# Altium PCB IMX6WBED.PcbDoc (part 5 of 10)
Units mil, origin at the board's own origin, x right, y up, seen from the top; angles counter-clockwise.
Board outline 3318.23 x 4815.16 mil, 6 copper layers (Top Layer, L2_GND_1, L3_INT_1, L6_INT_2, L7_PWR_2, Bottom Layer), stack 27.7 mil thick; 504 components, 400 nets, 2357 pads, 1199 vias.
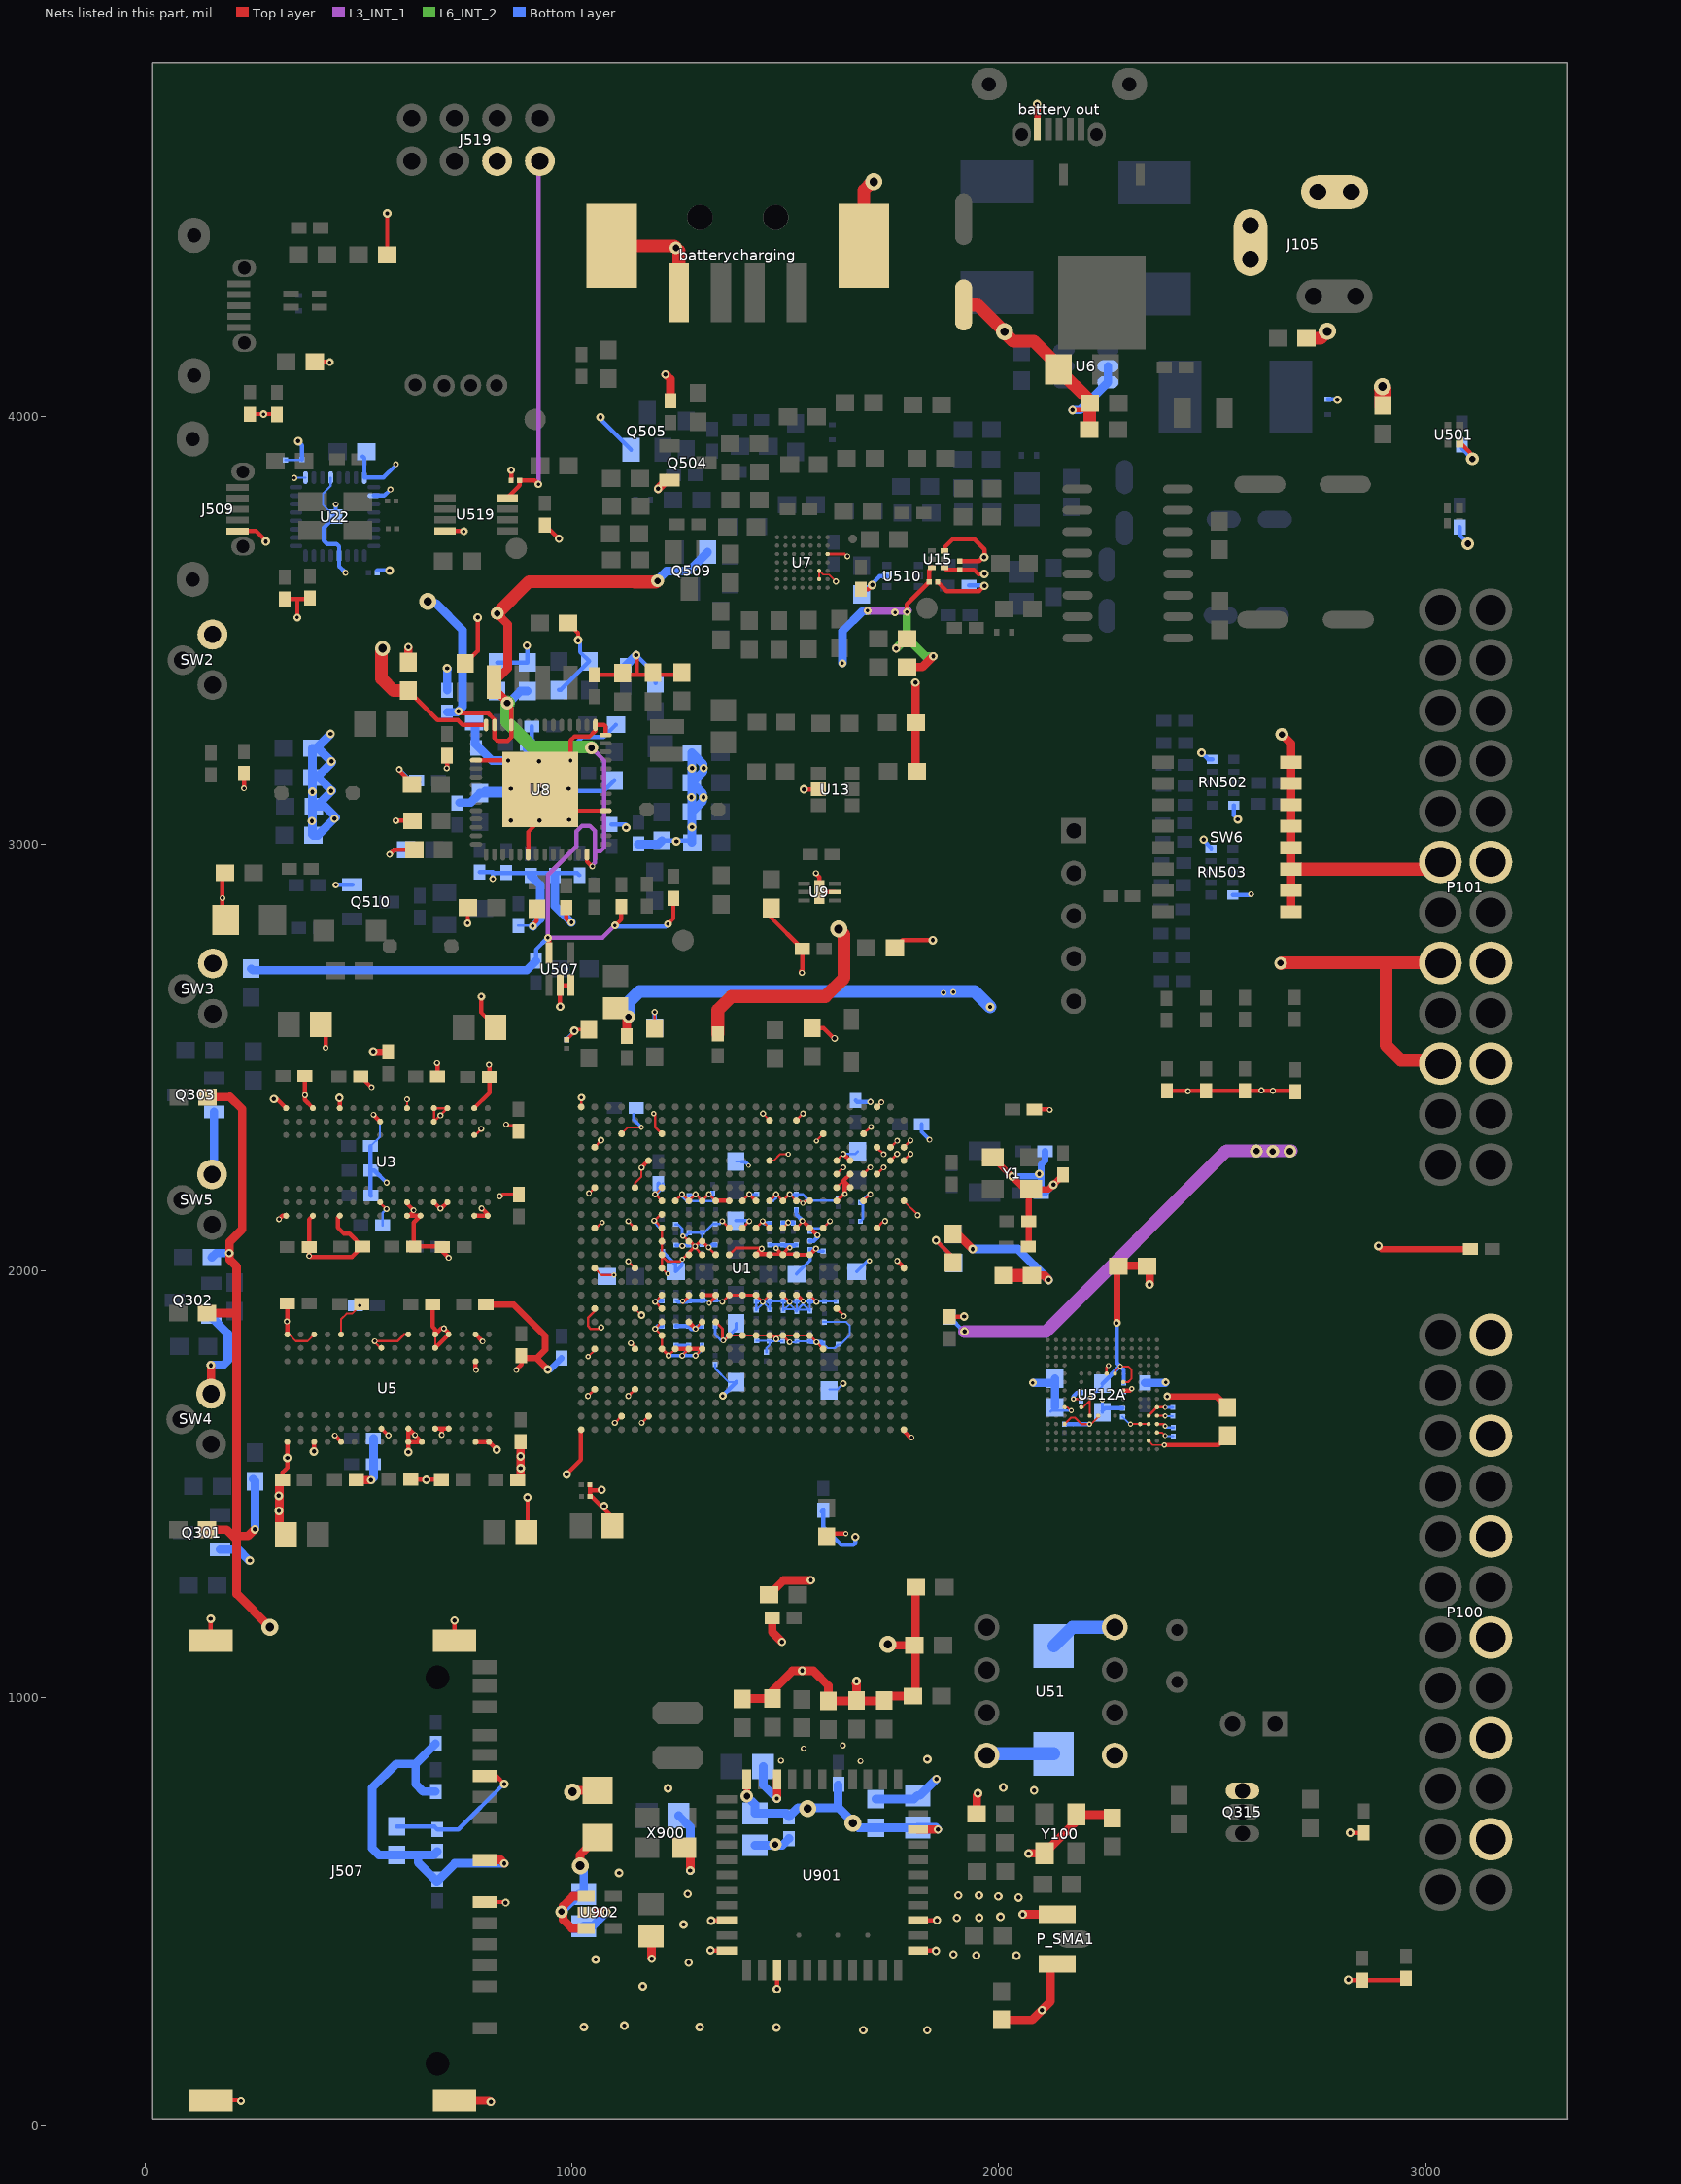
[diagram p9: the nets of this part, all layers, seen from the top]

## Via types
v1: diameter 14, hole 8, Top Layer to Bottom Layer, 296 vias
v2: diameter 14, hole 8, Top Layer to Bottom Layer, tented both sides, 244 vias
v3: diameter 20, hole 10, Top Layer to Bottom Layer, 221 vias
v4: diameter 20, hole 10, Top Layer to Bottom Layer, tented both sides, 112 vias
v5: diameter 18, hole 8, Top Layer to Bottom Layer, tented both sides, 74 vias
v6: diameter 12, hole 6, Top Layer to Bottom Layer, tented both sides, 60 vias
v7: diameter 16, hole 8, Top Layer to Bottom Layer, 59 vias
v8: diameter 30, hole 15, Top Layer to Bottom Layer, 33 vias
v9: diameter 40, hole 20, Top Layer to Bottom Layer, 16 vias
v10: diameter 30, hole 15, Top Layer to Bottom Layer, tented both sides, 16 vias
v11: diameter 18, hole 8, Top Layer to Bottom Layer, 16 vias
v12: diameter 12, hole 6, Top Layer to Bottom Layer, 13 vias
v13: diameter 16, hole 8, Top Layer to Bottom Layer, tented both sides, 8 vias
v14: diameter 80, hole 40, Top Layer to Bottom Layer, 5 vias
v15: diameter 14, hole 6, Top Layer to Bottom Layer, tented both sides, 4 vias
v16: diameter 50, hole 30, Top Layer to Bottom Layer, 3 vias
v17: diameter 16, hole 10, Top Layer to Bottom Layer, 3 vias
v18: diameter 25, hole 15, Top Layer to Bottom Layer, tented both sides, 3 vias
v19: diameter 35, hole 20, Top Layer to Bottom Layer, tented both sides, 3 vias
v20: diameter 10, hole 6, Top Layer to Bottom Layer, 3 vias
v21: diameter 18, hole 10, Top Layer to Bottom Layer, tented both sides, 2 vias
v22: diameter 80, hole 45, Top Layer to Bottom Layer, 1 vias
v23: diameter 40, hole 20, Top Layer to Bottom Layer, tented both sides, 1 vias
v24: diameter 11, hole 6, Top Layer to Bottom Layer, tented both sides, 1 vias
v25: diameter 13, hole 6, Top Layer to Bottom Layer, tented both sides, 1 vias
v26: diameter 14, hole 6, Top Layer to Bottom Layer, 1 vias

## Nets (pads, with @x,y where several pads share a name; then routed paths per layer and width w, separated by ;. In a path a pad name is that pad's centre, name@x,y a point inside that pad or via, vN(x,y) a via of type N, cw(c..) or ccw(c..) an arc to the next point about the centre after c; other vN are vias at no path point) (continued)
GEN_1V8: C94.1 C553.2 C767.1 J519.8 Q505.2 R45.2 R104.2 R183.2 R189.2 R694.2 U8.28 U15.6 U519.8 | length 3675.3
  Top Layer w10: v19(556.08,3457.51) 556.08,3396.29 593.93,3358.44 C553.2@616.47,3358.44 684.81,3290.1 732.27,3290.1 744.2,3278.17 U8.28@798.71,3278.17 ; U519.8@848.13,3809.9 877.47,3839.24 C767.1@877.47,3850.9 912.47,3850.9 v5@919.47,3843.9 ; R694.2@936.47,3746.31 936.97,3746.31 v3@968.68,3714.6 ; v5@1689.47,3547.9 v5@1694.47,3542.9 ; v3@1759.16,3455.98 1761.01,3455.98 R183.2@1784.93,3479.9 ; v5(1784.47,3542.9) 1784.47,3560.9 C94.1@1836.47,3612.9 1836.47,3640.42 U15.6@1842.95,3646.9
  Top Layer w20: R45.2@1341.47,2554.49 R45.2@1341.47,2568.9 ; R189.2@1784.93,3413.9 1820.42,3413.9 v3@1844.77,3438.25
  Top Layer w30: v19(556.08,3457.51) 553.57,3455 553.57,3386.72 581.85,3358.44 C553.2@616.47,3358.44 ; R45.2@1341.47,2554.49 1341.47,2610.88 1372.97,2642.38 1593.54,2642.38 1637.2,2686.04 1637.2,2787.08 v9@1622.45,2801.83
  L3_INT_1 w10: v5(921.47,3841.9) J519.8@921.47,4597.77
  L3_INT_1 w20: v5(1692.47,3545.9) v5@1786.47,3545.9
  L3_INT_1 w30: v4(1919.47,1857.9) 2110.47,1857.9 2533.58,2281.01 v8@2685.54,2281.01
  L6_INT_2 w20: v3(1759.05,3457.49) 1784.47,3482.91 ; v5(1784.47,3542.9) 1784.47,3482.91 ; v3(1846.36,3439.21) 1828.17,3439.21 1784.47,3482.91
  Bottom Layer w10: v3@1066.69,3997.91 1066.69,3994.68 Q505.2@1138.47,3922.9 ; R104.2@1884.47,1891.49 v4@1917.06,1858.9
  Bottom Layer w20: v5(1633.47,3422.9) 1633.47,3497.5 1680.87,3544.9 1692.47,3544.9 v5(1692.47,3545.9)
  other v3: 969.3,3714.6 1066.69,3999.23
  other v5: 1756.47,3541.9
  other v8: 2603.39,2280.27 2641.64,2279.54 2681.68,2279.88
  other v9: 1624.63,2800.09
GEN_2V5: C648.2 C654.1 C655.2 R85.1 R600.2 SH503.1 SH503.2 U1.H10 U1.J10 | length 1456.6
  Top Layer w6: U1.J10@1525.5,2100.44 v2@1541.25,2116.18
  Top Layer w10: v2@1541.25,2116.18 U1.H10@1557,2100.44 v2@1572.53,2084.9
  Top Layer w20: R600.2@1128.47,2549.49 R85.1@1128.47,2590.9 ; C654.1@1892.47,2086.36 1903.01,2086.36 v4(1938.61,2050.76) ; SH503.2@2077.93,1988.9 2106.98,1988.9 v3@2114.56,1981.32
  Top Layer w30: SH503.1@2011.01,1988.9 SH503.2@2077.93,1988.9
  Bottom Layer w10: C648.2@1525.47,2142.9 1525.47,2131.96 1540.71,2116.72 v2(1539.23,2116.72) ; C655.2@1557.47,2069.9 1566.47,2069.9 1574.47,2077.9 1574.47,2084.9 1575.53,2083.84 1575.53,2082 1574.97,2082 v2(1574.97,2082.99)
  Bottom Layer w20: v4(1938.61,2050.76) 2044.44,2050.76 v3(2116.83,1978.37)
  Bottom Layer w30: v10(1132.47,2594.9) 1132.47,2628.77 1158.23,2654.53 1942.84,2654.53 v4(1979.47,2617.9)
  other v1: 1870.27,2650.93 1893.32,2652.71
GEN_3V3: C19.2 C20.2 C21.2 C22.2 C23.2 C25.2 C26.2 C524.1 C525.1 C544.2 C545.2 C562.1 C746.2 C761.1 C763.1 C769.1 C788.1 C904.1 C906.2 C912.2 D201.1 D202.1 D203.1 J507.4 L2.1 P101.11 P101.15 P101.19 Q509.2 R19.2 R20.2 R28.2 R125.2 R169.2 R170.2 R178.2 R179.2 R502.2 R511.2 R512.2 R513.2 R544.2 R625.2 R670.2 R674.2 R675.2 R727.2 R785.2 R786.2 R850.2 R911.2 R912.2 R913.2 R914.2 R915.2 SH8.1 SH8.2 SH11.1 SH11.2 SW6.9 SW6.10 SW6.11 SW6.12 SW6.13 SW6.14 SW6.15 SW6.16 U8.25 U8.27 U8.55 U15.1 U51.1 U51.8 U507.5 U512A.C6 U512A.E6 U512A.F5 U512A.J10 U512A.K9 U512A.M4 U512A.N4 U512A.P3 U512A.P5 U901.9 U901.22 U902.1 U902.3 | length 11805.2
  Top Layer w4.5: U512A.C6@2153.84,1680.33 2160.04,1680.33 v6@2168.47,1671.9 ; U512A.E6@2193.21,1680.33 2197.89,1680.33 2212.89,1695.33 ; U512A.J10@2271.95,1759.07 2271.95,1763.38 v6(2284.47,1775.9) ; v6(2308.47,1640.9) 2308.53,1640.95 U512A.M4@2331,1640.95 U512A.N4@2350.69,1640.95 ; U512A.P3@2370.37,1621.27 2382.1,1621.27 v6(2389.47,1613.9) ; U512A.P5@2370.37,1660.64 2388.73,1660.64 v6(2389.47,1659.9)
  Top Layer w5: U512A.F5@2212.89,1660.64 2212.89,1695.33 2212.89,1700.33 v6(2214.47,1701.9) ; v6(2284.47,1775.9) 2303.47,1775.9 2310.47,1768.9 2310.47,1746.9 2302.95,1739.38 U512A.K9@2291.63,1739.38
  Top Layer w10: v3@731.53,3308.9 734.51,3305.92 803.29,3305.92 815.21,3294 815.21,3293.86 818.39,3290.68 U8.27@818.39,3278.17 818.39,3247.65 825.17,3240.87 849.25,3240.87 857.75,3249.37 U8.25@857.75,3278.17 857.75,3318.62 851.47,3324.9 v10@851.47,3328.62 ; L2.1@817.47,3362.9 848.88,3329.84 v10@850.05,3328.62 ; v10@848.47,3328.62 v10@850.05,3328.62 ; v10@849.29,3330.23 849.29,3331.08 849.29,3331.51 849.64,3331.86 849.64,3331.73 851.47,3329.9 v10@851.47,3328.62 ; v10@853.47,3328.62 v10@851.47,3328.62 ; v5(943.47,2779.9) 946.47,2776.9 U507.5@946.47,2743.7 ; U8.55@1034.87,2974.9 1034.87,2958.5 v2@1044.47,2948.9 ; v5@1101.47,2808.9 1115.47,2822.9 R28.2@1115.47,2853.31 ; v5(1224.47,2811.9) 1237.47,2824.9 R125.2@1237.47,2872.31 ; U15.1@1872.47,3646.9 1877.47,3641.9 C746.2@1908.47,3641.9 ; R727.2@1884.47,1892.49 v4@1916.88,1892.49 ; 1920.87,3641.9 C746.2@1908.47,3641.9 ; v3@1965.12,3631.07 1952.95,3631.07 1942.12,3641.9 C746.2@1908.47,3641.9 ; v5@2276.01,1880.44 v5@2276.01,1881.44 ; v3@2819.18,339.83 2820.7,338.31 R179.2@2851.47,338.31 2948.47,338.31 R178.2@2953.47,343.31 ; v3@2824.74,683.68 2825.11,683.31 R170.2@2854.47,683.31 ; v10@850.05,3328.62 v10@850.08,3328.58 ; v10@850.05,3328.62 v10@851.47,3328.62
  Top Layer w15: v8(1409.41,769.48) U901.22@1409.41,808.94 ; v5@2276.47,1884.97 2276.59,1885.09 SH11.2@2276.59,2011.9 ; v5(2394.47,1705.9) 2509.93,1705.9 C22.2@2535.47,1680.36 ; v3@2889.56,2057.86 2896.52,2050.9 R169.2@3104.88,2050.9
  Top Layer w20: D201.1@144.93,1393.9 191.07,1393.9 213.87,1371.1 ; D202.1@144.93,1900.9 211.39,1900.9 214.44,1897.85 ; D203.1@145.93,2406.9 199.07,2406.9 ; 198.03,2407.94 199.07,2406.9 ; v3(256.67,1394.48) 241.01,1378.82 214.44,1378.82 ; v9(292.33,1165.31) 214.44,1243.2 214.44,1378.82 ; J507.4@795.34,620.09 833.28,620.09 v4(841.47,611.9) ; v8@823.44,3540.34 849.43,3514.35 849.43,3410.86 L2.1@817.47,3378.9 817.47,3362.9 849.29,3331.08 v10@850.47,3329.9 ; v9(1019.02,606.49) 1019.02,632.33 C769.1@1059.47,672.78 ; U902.3@1033.47,460.1 999.61,460.1 979.37,480.34 979.37,512.23 1002.04,534.9 U902.1@1033.47,534.9 ; R915.2@1398.47,997.36 1399.47,998.36 R914.2@1469.47,998.36 1469.47,1015.88 1516.41,1062.82 1565.42,1062.82 1600.47,1027.77 R913.2@1600.47,992.36 1730.47,992.36 1742.01,1003.9 R511.2@1799.01,1003.9 1805.01,1009.9 R513.2@1805.01,1258.9 ; R502.2@1468.88,1185.9 1468.88,1153.67 v3@1489.83,1132.72 ; v3@1665.45,1032.76 1666.47,1031.74 R912.2@1666.47,993.36 ; v9@1742.5,1124.23 1743.83,1122.9 R512.2@1802.01,1122.9 ; U901.9@1810.47,691.34 v3@1855.1,691.34 ; SH11.2@2276.59,2011.9 2339.93,2011.9 2353.41,1998.42 v3@2353.41,1970.11 ; v8@2664.76,3254.56 2684.47,3234.85 SW6.16@2684.47,3191.1 SW6.15@2684.47,3141.1 SW6.14@2684.47,3091.1 SW6.13@2684.47,3041.1 SW6.12@2684.47,2990.7 SW6.11@2684.47,2940.7 SW6.10@2684.47,2890.7 SW6.9@2684.47,2840.7 ; 199.07,2406.9 227.13,2378.84 227.13,2097.23 197.84,2067.94 197.84,2026.29 214.44,2009.69 214.44,1897.85 ; 214.44,1378.82 214.44,1897.85
  Top Layer w30: v8(824.79,3539.52) 899.04,3613.77 1146.41,3613.77 1146.87,3613.31 v8@1196.47,3613.31 ; v8@2661.08,2719.85 2662.36,2721.13 2906.77,2721.13 ; SW6.11@2684.47,2940.7 3017.82,2940.7 P101.11@3034.47,2957.35 ; P101.19@3034.47,2484.91 3026.02,2493.36 2941.88,2493.36 2906.77,2528.47 2906.77,2721.13 ; P101.15@3034.47,2721.13 2906.77,2721.13
  L3_INT_1 w10: v10@1045.47,3224.9 1075.47,3194.9 1075.47,2990.96 1066.64,2982.13 1053.47,2982.13 ; v2@1047.47,2949.77 1053.47,2955.77 1053.47,2982.13 ; v5(1100.47,2808.9) 1071.47,2779.9 v5(943.47,2779.9) 943.47,2926.9 1010.47,2993.9 1010.47,3028.9 1023.47,3041.9 1041.47,3041.9 1053.47,3029.9 1053.47,2982.13
  L6_INT_2 w30: v10@849.29,3330.23 849.29,3331.51 849.64,3331.86 849.64,3331.73 851.47,3329.9 847.42,3325.85 847.42,3285.6 906.12,3226.9 1044.47,3226.9 1045.8,3225.57 v10(1045.8,3224.52)
  Bottom Layer w4.5: v6@2167.01,1670.44 v6(2169.47,1672.9) ; C23.2@2192.47,1694.9 2199.47,1701.9 v6(2214.47,1701.9) 2242.47,1729.9 C26.2@2242.47,1735.36 C26.2@2243.93,1735.36 ; C21.2@2289.47,1657.9 v6@2307.47,1639.9 ; v6@2387.47,1659.9 v6(2389.47,1659.9) C20.2@2407.47,1659.9 ; v6@2389.47,1612.9 C19.2@2408.47,1612.9
  Bottom Layer w6: SH8.2@2121.47,1670.44 2123.93,1672.9 v6(2169.47,1672.9)
  Bottom Layer w10: R19.2@915.47,2725.49 915.47,2751.9 v5(943.47,2779.9) ; v5(1100.47,2808.9) 1102.84,2805.81 1219.84,2805.81 v5(1224.47,2811.9) ; R625.2@1585.06,1435.9 R625.2@1588.47,1439.31 1588.47,1399.9 1630.47,1357.9 1659.47,1357.9 1663.47,1361.9 v4@1663.47,1374.9 ; C26.2@2242.47,1735.36 2283.01,1775.9 v6(2284.47,1775.9) ; v5(2276.47,1877.9) 2276.47,1783.9 v6(2284.47,1775.9) ; C25.2@2292.47,1736.9 2292.47,1767.9 v6(2284.47,1775.9)
  Bottom Layer w20: R850.2@155.93,2030.9 166.26,2041.23 v3(196.96,2041.23) ; R785.2@248.47,2707.36 252.15,2703.68 394.66,2703.68 ; R786.2@253.04,1511.87 R786.2@257.47,1507.44 257.47,1397.19 v3@257.78,1396.88 ; 368.05,2703.68 394.66,2703.68 ; v9@667.53,3562.92 681.16,3562.92 743.56,3500.52 743.56,3320.79 731.08,3308.31 C562.1@707.47,3308.31 ; R674.2@680.47,780.31 651.06,780.31 633.47,797.9 633.47,845.31 ; R675.2@680.47,892.31 633.47,845.31 ; C763.1@684.47,640.31 675.6,631.44 639.47,631.44 ; v4@836.17,612.2 725.47,612.2 683.32,570.05 639.47,613.9 639.47,631.44 ; v10@851.74,3330.17 879.01,3357.44 C544.2@895.47,3357.44 ; R19.2@915.47,2725.49 893.66,2703.68 394.66,2703.68 ; v8(975.35,498.79) 1016.86,540.3 C906.2@1027.47,540.3 1027.47,603.08 v9@1022.22,608.33 ; v8@1194.57,3612.04 1221.03,3638.5 1273.07,3638.5 Q509.2@1317.47,3682.9 ; v8(1409.41,769.48) 1428.47,750.42 C912.2@1428.47,729.3 1500.66,729.3 C524.1@1508.47,721.49 1529.29,742.31 1623.47,742.31 ; R544.2@1623.47,796.31 1623.47,742.31 ; v3(1857.12,691.35) 1851.97,696.5 C904.1@1809.47,696.5 1808.41,695.44 C525.1@1711.47,695.44 1670.34,695.44 1623.47,742.31 ; v5@2082.01,1737.36 SH8.1@2121.47,1737.36 ; SH8.2@2131.47,1680.44 SH8.1@2131.47,1747.36 ; R20.2@2342.47,1737.49 v5@2389.06,1737.49 ; 633.47,845.31 587.88,845.31 531.47,788.9 531.47,647.9 547.93,631.44 C761.1@589.47,631.44 639.47,631.44
  Bottom Layer w30: U51.8@1971.47,864.9 1975.49,868.92 C788.1@2128.47,868.92
  other v2: 1047.47,2946.9
  other v3: 2818.49,339.48 2822.99,683.9 1666.44,1038.97 1539.15,1063.25 1491.91,1130.93 2352.79,1967.82 2889.11,2058.01 734.21,3310.36 1966.01,3632.18
  other v4: 1663.47,1376.9 1918.47,1892.9
  other v5: 2079.47,1737.9 2390.47,1738.9
  other v8: 2659.81,2720.52 2662.83,3256.21 1200.3,3615.75
  other v9: 1657.97,706.46 1551.98,740.36 1740.05,1125.1 662.21,3567.54
  other v10: 848.13,3329.68
GND: "battery out.5" batterycharging.4 batterycharging.5 batterycharging.6 C9.2 C13.1 C19.1 C20.1 C21.1 C22.1 C23.1 C25.1 C26.1 C27.1 C31.1 C32.2 C33.1 C35.1 C36.1 C37.1 C38.1 C40.1 C41.1 C42.1 C43.1 C44.1 C45.1 C46.1 C47.1 C48.1 C49.1 C51.1 C52.1 C53.1 C55.1 C57.1 C58.1 C59.1 C61.1 C69.2 C76.1 C77.1 C79.1 C94.2 C125.1 C126.2 C127.1 C128.1 C129.1 C130.1 C200.2 C501.1 C505.1 C506.1 C524.2 C525.2 C539.1 C544.1 C545.1 C546.2 C550.1 C551.2 C552.1 C553.1 C554.1 C555.2 C556.2 C558.2 C559.1 C560.1 C561.2 C562.2 C563.1 C564.1 C565.1 C566.1 C567.1 C568.1 C569.1 C570.1 C571.1 C572.2 C573.1 C574.1 C575.1 C576.1 C577.1 C578.1 C579.1 C580.2 C581.1 C582.1 C583.1 C584.1 C586.1 C589.2 C590.1 C591.1 C592.2 C593.2 C594.1 C595.1 C596.1 C597.1 C599.1 C600.1 C601.1 C604.1 C605.2 C613.1 C614.1 C615.1 C616.1 C617.1 C618.1 C619.1 C620.1 C621.1 C623.1 C624.1 C627.1 C628.1 C629.1 C630.2 C632.1 C633.1 C634.2 C636.1 C639.1 C642.2 C643.1 C644.1 C645.1 C646.1 C647.1 C648.1 C649.1 C650.1 C652.1 C653.1 C654.2 C655.1 C656.1 C657.1 C658.1 C659.1 C660.1 C661.1 C662.1 C663.1 C664.1 C665.1 C666.1 C669.1 C670.1 C671.1 C672.1 C674.1 C675.1 C676.1 C677.1 C679.1 C680.1 C682.1 C683.1 C684.1 C685.1 C686.1 C687.1 C688.1 C689.1 C690.1 C691.1 C692.1 C693.1 C694.1 C695.1 C696.1 C697.1 C698.1 C701.1 C702.1 C703.1 C704.1 C705.1 C706.1 C707.1 C708.1 C709.1 C710.1 C711.1 C712.1 C713.1 C714.1 C715.1 C716.1 C717.1 C720.1 C721.1 C722.1 C723.2 C724.1 C725.2 C727.1 C728.1 C730.2 C731.1 C746.1 C761.2 C763.2 C766.1 C767.2 C768.2 C769.2 C788.2 C904.2 C906.1 C907.1 C908.2 C912.1 C913.1 C914.1 C930.1 C931.1 D1.2 D2.2 D501.1 J105.2 J105.2A J105.2B J105.3 J105.3A J105.3B J507.3 J507.6 J507.16 J507.17 J507.18 J507.19 J509.5 J519.7 L501.1 L519.1 P100.2 P100.6 P100.10 P100.14 P100.18 P100.22 P101.12 P101.16 P101.20 P_SMA1.1 Q301.2 Q302.2 Q303.2 Q315.1 Q504.2 Q510.2 R34.2 R38.2 R89.1 R95.1 R98.1 R105.1 R107.1 R108.1 R216.1 R591.1 R593.1 R599.1 R602.1 R605.1 R620.1 R635.1 R677.1 R725.1 RN502.5 RN502.10 RN503.5 RN503.10 SH50.2 SW2.1 SW3.1 SW4.1 SW5.1 U1.A4 U1.A5 U1.A8 U1.A13 U1.A25 U1.AA7 U1.AA10 U1.AA13 U1.AA16 U1.AA19 U1.AA22 U1.AB3 U1.AB24 U1.AD4 U1.AD7 U1.AD10 U1.AD13 U1.AD16 U1.AD19 U1.AD22 U1.AE1 U1.AE25 U1.B4 U1.B5 U1.C1 U1.C4 U1.C6 U1.C10 U1.D3 U1.D6 U1.D8 U1.E5 U1.E6 U1.E7 U1.F5 U1.F6 U1.F7 U1.F8 U1.F16 U1.G3 U1.G10 U1.G19 U1.H8 U1.H12 U1.H15 U1.H18 U1.J2 U1.J8 U1.J12 U1.J15 U1.J18 U1.K8 U1.K10 U1.K12 U1.K15 U1.K18 U1.L2 U1.L5 U1.L8 U1.L10 U1.L12 U1.L15 U1.L18 U1.M8 U1.M10 U1.M12 U1.M15 U1.M18 U1.N8 U1.N10 U1.N15 U1.N18 U1.P8 U1.P10 U1.P12 U1.P15 U1.P18 U1.R8 U1.R12 U1.R15 U1.R17 U1.T8 U1.T11 U1.T12 U1.T15 U1.T17 U1.T19 U1.U8 U1.U11 U1.U12 U1.U15 U1.U17 U1.U19 U1.V8 U1.V19 U1.W3 U1.W7 U1.W8 U1.W9 U1.W10 U1.W11 U1.W12 U1.W13 U1.W15 U1.W16 U1.W17 U1.W18 U1.W19 U1.Y5 U1.Y24 U3.A9 U3.B1 U3.B3 U3.B9 U3.D1 U3.D8 U3.E1 U3.E2 U3.E8 U3.F9 U3.G1 U3.G8 U3.G9 U3.J2 U3.J8 U3.M1 U3.M9 U3.P1 U3.P9 U3.T1 U3.T9 U5.A9 U5.B1 U5.B3 U5.B9 U5.D1 U5.D8 U5.E1 U5.E2 U5.E8 U5.F9 U5.G1 U5.G8 U5.G9 U5.J2 U5.J8 U5.M1 U5.M9 U5.P1 U5.P9 U5.T1 U5.T9 U6.2 U6.3 U7.F2 U7.F3 U7.G5 U8.5 U8.14 U8.15 U8.32 U8.48 U8.57 U9.2 U9.7 U13.2 U15.3 U22.4 U22.17 U22.20 U22.24 U22.26 U22.33 U51.4 U501.2 U507.2 U507.3 U510.2 U512A.C4 U512A.E7 U512A.G5 U512A.H10 U512A.K8 U512A.N2 U512A.N5 U512A.P4 U512A.P6 U519.4 U901.1 U901.3 U901.20 U901.31 U901.33 U901.36 U902.2 X900.2 Y1.2 Y1.4 Y100.2 Y100.4 | length 24102
  Top Layer w3: U1.AD16@1053.06,1911.46 U1.AD16@1053.47,1911.87 ; U7.F3@1578.87,3639.26 1588.37,3629.76 1602.13,3629.76 v1@1617.9,3613.99 ; U512A.N2@2350.69,1601.59 2360.37,1591.9 v6@2384.47,1591.9
  Top Layer w4: U1.AA16@1147.55,1911.46 1147.55,1910.42 v11@1162.52,1895.45 ; U1.W9@1207.51,2131.93 U1.W9@1210.54,2131.93
  Top Layer w4.5: v6(1037.88,1799.06) 1053.06,1814.24 U1.AD19@1053.06,1816.97 U1.AD19@1052.23,1817.8 ; U1.AB3@1116.05,2320.91 1131.05,2335.9 v6(1162.47,2335.9) v6@1163.47,2335.9 ; U1.AA7@1147.55,2194.92 1147.55,2205.56 1162.3,2220.31 1162.3,2241.73 v2@1163.47,2242.9 ; U1.W13@1210.54,2005.95 v6@1223.47,1993.02 ; U1.W12@1210.54,2037.44 U1.W12@1211.55,2036.44 ; U1.K12@1494.01,2037.44 U1.K12@1494.01,2042.36
  Top Layer w4.7: U1.L5@1462.51,2257.92 1472.49,2257.92 1487.47,2272.9 v6(1506.47,2272.9) ; v2(1509.75,2179.18) U1.J8@1525.5,2163.43 1534.94,2163.43 v6(1540.47,2157.9) 1546,2163.43 U1.H8@1557,2163.43
  Top Layer w5: U5.T1@332.9,1850.9 337.46,1850.9 352.79,1835.57 380.69,1835.57 U5.P1@396.02,1850.9 ; U5.M1@459.01,1850.9 459.01,1886.62 471.81,1899.42 484.58,1899.42 C59.1@507.06,1921.9 ; v1@537.97,1832.33 550.9,1819.4 U5.J2@553.5,1819.4 ; U3.G1@613.49,2380.9 v1@613.49,2399.06 ; U5.E2@679.49,1819.4 U5.E1@679.49,1850.9 ; U1.AD13@1053.06,2005.95 1068.71,1990.3 v12(1098.32,1990.3) ; v1@1132.07,2021.22 1132.28,2021.22 U1.AA13@1147.55,2005.95 ; C40.1@1193.47,2567.36 v2@1193.47,2601.9 ; v2(1194.79,1864.22) U1.W18@1210.54,1848.47 U1.W19@1210.54,1816.97 ; v2(1194.79,2179.18) U1.W7@1210.54,2194.92 ; U1.P18@1368.02,1848.47 U1.H18@1557,1848.47 ; v2(1446.76,1927.21) U1.L15@1462.51,1942.96 ; v2(1447.47,2367.9) 1462.51,2352.86 U1.L2@1462.51,2352.4 ; v6@1476.47,2053.9 1477.55,2053.9 U1.K12@1494.01,2037.44 ; v6@1573.47,2305.88 U1.G3@1588.49,2320.91 ; U7.F2@1578.87,3619.58 U7.F3@1578.87,3639.26 ; U1.A8@1777.47,2163.43 1809.75,2131.15 v1@1811.37,2131.15 ; U512A.C4@2153.84,1640.95 2168.78,1655.9 2178.47,1655.9 2193.47,1640.9 v6(2212.47,1640.9) ; v6(2174.58,1700.01) U512A.E7@2193.21,1700.01 ; v6@2215.47,1640.9 2232.58,1658.01 U512A.G5@2232.58,1660.64 ; U512A.H10@2252.26,1759.07 2252.26,1773.7 v6(2256.47,1777.9)
  Top Layer w6: v1(537.6,1835.01) 537.78,1835.19 590.81,1835.19 606.52,1850.9 U5.G1@616.49,1850.9 ; U3.J8@550.5,2160.43 550.5,2159.59 v1(565.35,2144.74) ; U3.B3@770.97,2317.91 773.51,2317.91 v1@787.81,2332.21 ; v1@848.21,2340.12 861.66,2340.12 C44.1@874.47,2327.31 ; U1.AE25@1020.81,1627.24 U1.AE25@1021.57,1628 ; U1.AE1@1021.57,2383.9 1022.14,2384.47 v11@1022.14,2400.24 ; v2(1037.31,1706.74) U1.AD22@1053.06,1722.48 ; v2@1039.04,2180.9 U1.AD7@1053.06,2194.92 ; U1.AD16@1049.34,1911.46 U1.AD16@1053.06,1911.46 ; U1.AD16@1053.06,1909.91 U1.AD16@1053.06,1911.46 ; U1.AD13@1053.06,2005.31 U1.AD13@1053.06,2005.95 ; U1.AD10@1053.06,2101.31 U1.AD10@1053.06,2100.44 1056.9,2100.44 v12@1070.85,2114.39 ; U1.AD4@1053.06,2289.41 v7@1067.13,2303.48 ; v1@1068.61,1865.28 1067.18,1863.85 1058.16,1863.85 1058.06,1863.75 1044.38,1863.75 1037.3,1870.83 1037.3,1889.79 1053.06,1905.55 U1.AD16@1053.06,1911.46 ; v2(1100.31,1643.74) U1.AB24@1116.05,1659.49 ; v2(1131.8,1706.74) U1.AA22@1147.55,1722.48 ; v2(1131.8,2116.18) U1.AA10@1147.55,2100.44 ; v2@1137.46,1831.83 1141.79,1827.5 1141.79,1826.58 1147.55,1820.82 U1.AA19@1147.55,1816.97 U1.AA19@1147.55,1820.69 ; v2(1163.3,1643.74) U1.Y24@1179.05,1659.49 ; v6@1192.47,2368.9 1194.29,2367.08 1194.29,2365.62 1194.74,2365.17 1194.74,2336.71 U1.W3@1210.54,2320.91 ; v2(1194.79,1864.22) U1.W17@1210.54,1879.96 ; v2(1194.79,2179.18) U1.W8@1210.54,2163.43 ; U1.W9@1207.51,2131.93 1192.71,2117.13 1192.71,2114.66 1193.47,2113.9 1195.47,2113.9 1195.47,2115.51 U1.W10@1210.54,2100.44 U1.W11@1210.54,2068.94 U1.W12@1210.54,2037.44 U1.W12@1210.54,2035.43 ; U1.W16@1210.54,1911.46 v2(1194.8,1927.2) U1.W15@1210.54,1942.96 ; U1.W13@1210.54,2005.95 U1.W12@1210.54,2035.43 ; v2(1226.29,1801.22) U1.V19@1242.04,1816.97 ; U1.V8@1242.04,2163.43 v2(1257.79,2179.18) U1.U8@1273.53,2163.43 v2(1289.28,2179.18) U1.T8@1305.03,2163.43 v2(1320.78,2179.18) U1.R8@1336.53,2163.43 ; v2(1258.29,1801.01) 1258,1801.01 1257.79,1801.22 U1.U19@1273.53,1816.97 ; v6(1259.47,2080.9) 1259.47,2083 U1.U11@1273.53,2068.94 ; U1.U12@1273.53,2037.44 1269.01,2037.44 v6(1258.47,2026.9) 1253.47,2021.9 1224.07,2021.9 U1.W12@1210.54,2035.43 ; v2(1288.47,2056.9) 1288.47,2054 U1.T12@1305.03,2037.44 ; v2(1289.28,1801.22) U1.T19@1305.03,1816.97 ; v2(1289.28,1864.22) U1.T17@1305.03,1879.96 ; v2@1320.78,2053.19 U1.R12@1336.53,2037.44 ; U1.R17@1336.53,1879.96 1352.27,1864.22 1352.27,1839.1 1355.46,1835.91 U1.P18@1368.02,1848.47 ; v2(1352.27,1927.21) U1.P15@1368.02,1942.96 U1.N15@1399.52,1942.96 U1.M15@1431.01,1942.96 v2(1446.76,1927.21) ; v2(1352.27,2116.18) U1.P10@1368.02,2100.44 ; U1.P12@1368.02,2037.44 1383.77,2053.19 1446.76,2053.19 U1.M12@1431.01,2037.44 ; U1.N10@1399.52,2100.44 v2(1415.27,2116.18) ; U1.N8@1399.52,2163.43 v2(1415.27,2179.18) ; U1.M10@1431.01,2100.44 v2(1446.76,2116.18) U1.L10@1462.51,2100.44 ; U1.L8@1462.51,2163.43 v2(1478.26,2179.18) U1.K8@1494.01,2163.43 v2(1509.75,2179.18) ; U1.L18@1464.9,1848.47 U1.L18@1462.51,1848.47 1469.9,1848.47 v2(1478.47,1839.9) ; U1.K18@1494.01,1848.47 v2(1509.75,1832.72) ; U1.K15@1494.01,1942.96 v2(1509.75,1927.21) ; U1.K10@1494.01,2100.44 1506.47,2112.9 1506.43,2112.94 v2(1506.43,2113) ; U1.J2@1525.5,2352.4 v2(1541.25,2368.15) ; U1.H18@1557,1848.47 v2(1572.75,1832.72) U1.G19@1588.49,1816.97 ; U1.H15@1557,1942.96 v2(1572.75,1927.21) ; U1.G10@1588.49,2100.44 v2(1604.24,2116.18) ; U7.G5@1598.55,3678.62 1638.37,3678.62 1641.79,3675.2 v2@1645.69,3675.2 ; U1.F16@1619.99,1911.46 1637.55,1893.9 1638.47,1893.9 1637.08,1895.29 1637.08,1895.62 1636.78,1895.32 v2(1636.78,1893.75) ; U1.F7@1619.99,2194.92 1635.74,2210.67 ; U1.F6@1619.99,2226.42 v2(1635.74,2242.17) ; U1.F5@1619.99,2257.92 v2(1635.74,2273.66) ; U1.D8@1682.98,2163.43 v2(1698.73,2179.18) ; U1.D6@1682.98,2226.42 v2(1698.73,2242.17) ; U1.D3@1682.98,2320.91 1698.97,2336.9 v2(1700.47,2336.9) ; U1.C10@1714.48,2100.44 1730.55,2116.51 v2(1733.53,2116.51) ; U1.C6@1714.48,2226.42 v2(1730.23,2242.17) ; U1.C4@1714.48,2289.41 1714.48,2288.22 v2(1730.12,2272.58) ; U1.C1@1714.48,2383.9 1727.8,2397.22 1725.04,2397.22 1724.94,2397.12 v2(1724.94,2394.72) ; U1.B5@1745.97,2257.92 v2(1761.72,2273.66) ; U1.B4@1745.97,2289.41 1761.72,2305.16 v2(1762.08,2304.8) ; U1.A5@1777.47,2257.92 v2(1793.22,2273.66) ; U1.A4@1777.47,2289.41 v2(1793.22,2305.16) ; U512A.N5@2350.69,1660.64 U512A.P6@2370.37,1680.33 2389.04,1680.33 v6(2389.47,1679.9) ; U512A.P4@2370.37,1640.95 2384.41,1640.95 v6(2389.47,1635.9) ; U3.E2@676.49,2349.4 U3.E1@676.49,2380.9 U3.D1@707.98,2380.9 U3.E2@676.49,2349.4
  Top Layer w8: U5.J8@553.5,1630.43 569.32,1614.61 v1@569.49,1614.61 ; C48.1@987.47,2540.9 1011.93,2565.36 C38.1@1039.47,2565.36 ; U1.W19@1210.54,1816.97 v2(1226.29,1801.22) ; v6(1259.02,1928.58) 1259.02,1926.49 1259.47,1926.04 1259.47,1924.9 1273.53,1938.96 U1.U15@1273.53,1942.96 ; U1.U12@1269.01,2037.44 v2(1288.47,2056.9) ; U1.U11@1273.53,2068.94 1276.43,2068.94 v2(1288.47,2056.9) ; v2@1320.78,2053.19 U1.T11@1305.03,2068.94 1300.51,2068.94 v2(1288.47,2056.9) ; v6(1321.47,1923.9) 1336.53,1938.96 U1.R15@1336.53,1942.96 ; v2(1415.27,2179.18) U1.M8@1431.01,2163.43 ; U1.L12@1461.42,2039.27 1461.55,2039.4 1523.55,2039.4 U1.J12@1525.5,2037.44 ; v6@1476.47,2053.9 1492.93,2037.44 U1.K12@1494.01,2037.44 1494.01,2040.44 1509.47,2055.9 1510.03,2055.34 v6(1510.03,2053.91) ; U1.F8@1619.99,2163.43 v15@1635.74,2179.18
  Top Layer w10: J507.18@153.61,56.9 v5@224.47,56.9 ; J507.17@153.61,1133.68 v4@153.61,1188.04 ; D2.2@181.01,2931.9 181.01,2801.25 C31.1@186.35,2795.9 ; J509.5@216.47,3732.54 259.83,3732.54 v4@282.47,3709.9 ; v2(231.47,3129.9) C597.1@231.47,3164.31 ; R620.1@245.47,4006.31 307.47,4006.31 C697.1@308.47,4005.31 ; v3@302.48,2399.99 310.94,2399.99 U3.T1@330.03,2380.9 ; v1(313.45,2120.67) 321.71,2128.93 U3.T9@330.03,2128.93 ; C614.1@321.88,1508.9 321.88,1527.68 333.03,1538.83 U5.T9@333.03,1598.93 ; C766.1@326.47,3573.31 356.47,3573.31 ; U5.T1@332.9,1850.9 C666.1@332.9,1925.79 ; v5(356.47,3529.9) 356.47,3573.31 ; C613.1@374.06,2455.9 374.06,2399.86 U3.P1@393.02,2380.9 ; v1(383.98,2035.08) v1@384.06,2035 ; v1@384.06,2034.78 v1@384.06,2035 ; R677.1@386.47,3575.31 384.47,3573.31 356.47,3573.31 ; U3.P9@393.02,2128.93 384.06,2119.97 C53.1@384.06,2055.9 v1@384.06,2035 ; v3(395.33,1576.67) 396.02,1577.36 U5.P9@396.02,1598.93 ; L519.1@396.93,4128.9 v5@429.47,4128.9 ; v2@422.87,2523 C35.1@422.87,2593.9 ; v1@444.17,1614.47 459.01,1599.63 U5.M9@459.01,1598.93 ; v3@453.32,2402.84 456.01,2400.15 U3.M1@456.01,2380.9 ; U3.M9@456.01,2128.93 451.23,2124.15 451.23,2101.62 465.78,2087.07 478.89,2087.07 C42.1@509.06,2056.9 484.18,2032.02 387.04,2032.02 v1@384.06,2035 ; C58.1@505.06,2454.9 v1@529.75,2430.21 ; v1@536.6,2363.31 U3.J2@550.5,2349.4 ; v4(566.93,4476.44) C61.1@566.93,4378.9 C61.1@578.47,4390.44 ; v13(572.47,2974.9) 583.47,2985.9 C584.1@631.01,2985.9 ; v13@584.47,3053.9 v13(587.47,3053.9) C580.2@626.01,3053.9 C580.2@631.01,3048.9 ; v13@594.47,3172.44 C572.2@625.01,3141.9 ; U3.G9@613.49,2128.93 U3.G9@618.84,2128.93 ; U3.G8@613.49,2160.43 613.49,2157.11 v1(628.59,2142.01) ; v3@616.49,1577.14 U5.G9@616.49,1598.93 ; C616.1@622.06,1510.9 692.88,1510.9 C615.1@693.88,1509.9 ; v1@628.5,2138.59 U3.G9@618.84,2128.93 ; C57.1@673.06,1920.9 673.06,1869.33 679.49,1862.9 U5.E1@679.49,1850.9 693.67,1865.08 v1(700.06,1865.08) 710.98,1854.16 U5.D1@710.98,1850.9 U5.E2@679.49,1819.4 ; U3.E8@676.49,2160.43 676.49,2160.07 691.3,2145.26 692.81,2145.26 U3.D8@707.98,2160.43 ; U5.E8@679.49,1630.43 694.9,1630.43 ; C37.1@685.06,2454.9 v1@685.06,2485.59 ; v1@695.28,1619.62 694.9,1620 694.9,1630.43 ; U519.4@702.47,3733.12 v5@743.25,3733.12 ; v2@707.47,3178.9 C565.1@707.47,3206.31 ; U5.D8@710.98,1630.43 694.9,1630.43 ; v1@712.08,2029.73 695.88,2045.93 C45.1@695.88,2055.9 694.88,2056.9 C41.1@629.06,2056.9 629.06,2113 U3.F9@644.99,2128.93 U3.G9@618.84,2128.93 ; J507.16@724.47,1133.68 v4(724.47,1180.9) ; C554.1@749.47,3422.36 778.93,3451.82 v4(778.93,3529.68) ; v5@756.01,2817.44 C589.2@756.01,2850.9 ; U3.B9@770.97,2128.93 U3.A9@802.47,2128.93 802.47,2132.32 v1@790.69,2144.1 ; U3.B1@770.97,2380.9 807.06,2416.99 C46.1@807.06,2453.9 ; U5.B9@773.97,1598.93 U5.A9@805.47,1598.93 v3@820.7,1583.7 ; v1@773.97,1770.98 U5.B3@773.97,1787.91 ; U5.B1@773.97,1850.9 v1@790.68,1834.19 ; U8.32@775.19,3195.75 856.62,3195.75 974.73,3077.64 U8.5@1078.47,3077.64 ; v5@786.87,2641.5 786.87,2605.41 C36.1@820.25,2572.03 ; J507.3@795.34,521.27 v21@840.84,521.27 ; J507.6@795.34,816.94 822.43,816.94 v4(841.47,797.9) ; v1@807.06,2482.45 C46.1@807.06,2453.9 ; C46.1@808.29,2455.13 C46.1@807.06,2453.9 ; v1@830.61,2173.41 832.59,2175.39 834.25,2175.39 837.35,2178.49 C647.1@875.47,2178.49 ; C767.2@857.47,3850.9 v5@857.47,3871.9 ; v1@871.14,1770.43 881.47,1780.76 C620.1@881.47,1801.31 C620.1@887.29,1795.49 ; C79.1@895.87,1383.92 v4@895.87,1470.75 ; U8.48@897.11,2974.9 897.26,2975.05 897.26,3027.69 v4(923.47,3053.9) ; v5@906.47,2808.9 917.47,2819.9 C601.1@917.47,2847.44 ; v3@971.36,2615.38 972.06,2616.08 U507.2@972.06,2668.9 U507.3@997.65,2668.9 ; C599.1@986.47,2850.31 986.47,2824.9 v5@994.47,2816.9 ; v4@986.97,1523.4 1020.81,1557.24 U1.AE25@1020.81,1627.24 ; v5(996.47,3194.9) 996.47,3241.9 1005.47,3250.9 1040.47,3250.9 1054.55,3264.98 U8.15@1054.55,3278.17 1075.2,3278.17 1078.47,3274.9 U8.14@1078.47,3254.8 ; C546.2@1004.47,3516.9 C546.2@990.93,3516.9 1014.47,3493.36 v4(1014.47,3476.9) ; C728.1@1041.47,1498.9 1042.47,1497.9 1042.47,1485.9 ; C561.2@1053.47,3395.49 1151.47,3395.49 ; v4@1064.47,1485.9 1042.47,1485.9 ; C77.1@1094.87,1402.9 1094.87,1422.5 1042.47,1474.9 1042.47,1485.9 ; v4@1151.47,3439.9 1151.47,3395.49 ; v2@1163.47,2242.9 1178.49,2257.92 U1.Y5@1179.05,2257.92 ; U1.V19@1242.04,1816.97 U1.T19@1305.03,1816.97 ; C567.1@1257.47,3401.36 1251.6,3395.49 1151.47,3395.49 ; U1.U17@1273.53,1879.96 v2(1289.28,1864.22) ; U1.T15@1305.03,1942.96 U1.R15@1336.53,1942.96 ; v3@1324.76,408.05 1324.91,407.9 U901.33@1362.67,407.9 ; v3@1326.06,478.32 1362.23,478.32 U901.31@1362.67,478.76 ; U1.R8@1337.78,2164.68 1366.77,2164.68 U1.P8@1368.02,2163.43 ; v2(1444.39,2051.65) 1445.22,2051.65 1432.47,2038.9 1461.05,2038.9 U1.L12@1461.42,2039.27 ; C33.1@1466.47,2849.44 1466.47,2827.31 R34.2@1539.88,2753.9 1539.88,2705.31 v2@1536.47,2701.9 ; U901.36@1480.28,361.15 1480.28,320.94 v3@1480.81,320.41 ; U1.J15@1525.5,1942.96 1527.41,1942.96 v6(1541.47,1928.9) ; U1.J12@1525.5,2037.44 U1.H12@1557,2037.44 v2(1571.47,2051.9) ; v4(1543.07,3127.5) U13.2@1577.47,3127.5 ; C623.1@1562.47,2568.36 1589.09,2568.36 v17@1612.76,2544.69 ; v2@1573.47,2927.9 1579.41,2921.96 U9.7@1579.41,2886.9 U9.2@1615.35,2886.9 ; C69.2@1596.47,1377.44 1603.93,1384.9 v6(1641.47,1384.9) ; v2(1635.74,2273.66) U1.E5@1651.49,2257.92 ; v15(1639.47,2179.9) 1639.47,2178.9 1638.47,2178.9 1638.47,2207.94 ; U1.E7@1651.49,2194.92 1638.47,2207.94 ; U1.E6@1651.49,2226.42 1635.74,2210.67 1638.47,2207.94 ; C13.1@1676.47,3596.31 1693.62,3596.31 v3(1703.21,3605.9) ; C32.2@1755.93,2755.9 1774.09,2774.06 v4(1845.14,2774.06) ; v2(1762.04,2022.98) 1777.47,2007.55 U1.A13@1777.47,2005.95 ; U1.A25@1777.8,1628.12 1777.8,1624.18 v2@1793.3,1608.68 ; v2@1795.52,1607.43 v2(1795.52,1609.41) ; U901.1@1810.47,407.9 1852.43,407.9 v3@1852.64,408.11 ; U901.3@1810.47,478.76 1853.73,478.76 v3@1854.02,478.47 ; v4(1852.72,2071.34) 1892.47,2031.59 C654.2@1892.47,2019.44 ; C94.2@1856.47,3612.9 1877.57,3591.8 1953.55,3591.8 v3(1966.01,3604.26) ; U15.3@1872.47,3686.26 1872.47,3694.1 1891.83,3713.46 1942.36,3713.46 1966.21,3689.61 v3@1966.21,3672.53 ; C746.1@1908.47,3661.9 1908.91,3661.9 1954.01,3661.88 v3@1963.1,3670.97 ; R593.1@2083.06,2377.9 v2@2118.47,2377.9 ; v3(2172.58,4015.81) 2196.92,4015.81 C505.1@2213.01,4031.9 ; U512A.K8@2291.63,1719.7 2307.26,1719.7 v6(2311.47,1723.9) ; v6(2387.47,1591.9) 2513.93,1591.9 C22.1@2535.47,1613.44 ; R95.1@2393.47,2421.31 R98.1@2485.47,2421.31 R105.1@2576.47,2421.31 2692.47,2421.31 R108.1@2694.47,2419.31 ; U501.2@3079.59,3940.43 3103.93,3916.09 v8@3103.93,3901.87 ; U5.G9@616.49,1598.93 U5.F9@647.99,1598.93 U5.G8@616.49,1630.43 U5.G9@616.49,1598.93
  Top Layer w15: v3@532.7,2514.81 535.02,2512.49 C47.1@569.47,2512.49 ; C731.1@798.06,1920.9 863.23,1920.9 936.93,1847.2 936.93,1814.67 917.75,1795.49 ; C620.1@887.29,1795.49 917.75,1795.49 ; v3(943.08,1768.86) 917.75,1794.19 917.75,1795.49 ; Y1.4@1985.47,2265.7 Y1.2@2060.27,2190.9 ; R216.1@2070.06,2057.9 C55.1@2070.06,2115.9 Y1.2@2070.06,2184.93 ; Y1.2@2076.03,2190.9 2117.06,2190.9 C51.1@2150.47,2224.31 ; v3@2089.35,4733.78 2090.11,4733.02 2090.11,4673.9
  Top Layer w20: v3@154.1,1778.43 154.47,1778.06 SW4.1@154.47,1711.9 ; C49.1@314.07,1381.9 314.07,1501.09 C614.1@321.88,1508.9 ; C617.1@495.06,1509.9 v3@526.47,1509.9 ; v3@616.35,3458.47 616.47,3458.35 C553.1@616.47,3425.36 ; J507.19@724.47,56.9 805.64,56.9 v4(809.61,52.93) ; C76.1@873.06,1508.9 879.47,1515.31 C52.1@879.47,1599.31 ; v9@1009.89,780.98 1011.93,783.02 C769.2@1059.47,783.02 ; U902.2@1033.47,497.5 1079.69,497.5 v3@1080.17,497.98 ; C907.1@1185.47,441.5 1186.54,440.43 v3@1186.54,390.93 ; v3(1201.56,3831.38) 1222.08,3851.9 Q504.2@1228.47,3851.9 ; v3@1219.52,4099.32 1230.47,4088.37 R725.1@1230.47,4037.49 ; X900.2@1263.07,648.9 1277.22,634.75 v3@1277.22,597.33 ; SH50.2@1457.01,1235.9 1495.82,1274.71 v3@1557.99,1274.71 ; v3@1479.78,764.69 1480.28,765.19 U901.20@1480.28,808.95 ; v4@1804.93,3374.14 C200.2@1804.93,3283.9 1804.93,3172.9 C130.1@1807.93,3169.9 ; C931.1@1948.01,727.9 1948.01,770.41 v3@1950.48,772.88 ; C908.2@2006.47,245.44 2077.91,245.44 2121.43,288.96 2121.43,361.86 P_SMA1.1@2136.47,376.9 ; v3@2056.83,492.59 2057.14,492.9 P_SMA1.1@2136.47,492.9 ; v3@2072.74,635.86 2072.78,635.9 Y100.4@2106.67,635.9 2181.47,710.7 Y100.2@2181.47,726.46 2257.37,726.46 C930.1@2265.47,718.36
  Top Layer w30: batterycharging.5@1093.19,4400.26 1239.72,4400.26 1251.13,4388.85 1250.67,4388.39 batterycharging.4@1250.67,4290.61 ; batterycharging.6@1683.75,4400.26 1683.75,4530.87 v9@1702.77,4549.89 ; C9.2@1917.47,4261.9 1950.23,4261.9 v9(2013.02,4199.11) ; v9@2014.48,4195.47 2032.67,4177.28 2081.46,4177.28 2139.35,4119.39 C501.1@2139.35,4110.9 ; C501.1@2125.47,4124.78 C501.1@2139.35,4110.9 ; C506.1@2212.01,3969.9 2213.01,3970.9 C505.1@2213.01,4031.9 2213.01,4037.25 C501.1@2139.35,4110.9 ; D1.2@2720.93,4183.9 2753.35,4183.9 v9@2767.21,4197.76
  Top Layer w40: v9@2898.71,4066.24 2899.47,4065.48 L501.1@2899.47,4026.36
  L6_INT_2 w4.5: v2@1635.74,1895.71 1637.55,1893.9 1638.47,1893.9 1637.08,1895.29 1637.08,1895.62 1636.78,1895.32 v2(1636.78,1893.75)
  Bottom Layer w4: C645.1@1305.03,2163.43 v2(1320.78,2179.18) ; C649.1@1383.47,2255.36 1397.15,2255.71 v24(1413.57,2246.27)
  Bottom Layer w4.7: C695.1@1588.47,1879.9 1642.47,1879.9 1650.47,1871.9 1650.47,1848.9 1628.47,1826.9 C709.1@1623.47,1826.9
  Bottom Layer w5: C126.2@328.47,3898.9 366.47,3898.9 C125.1@367.47,3899.9 ; v2@354.47,3855.9 356.17,3857.6 U22.17@375.57,3857.6 ; U22.20@434.67,3857.6 434.67,3838.1 416.47,3819.9 416.47,3794.3 U22.33@444.52,3766.25 ; C43.1@528.06,2291.9 549.82,2313.66 549.82,2350.41 v1(534.91,2365.32) ; C696.1@1243.47,1929.9 1248.47,1924.9 1259.47,1924.9 1269.47,1924.9 C692.1@1274.47,1929.9 ; C725.2@1335.47,1780.9 1335.47,1770.9 1366.93,1739.44 C716.1@1384.47,1739.44 ; v5@1351.47,1706.44 v5@1352.61,1707.57 ; C710.1@1432.47,1835.9 1461.47,1835.9 C713.1@1462.47,1834.9 ; C724.1@1455.47,1808.9 1455.47,1818.9 1462.47,1825.9 C713.1@1462.47,1834.9 ; C672.1@1463.47,2060.9 1470.33,2060.9 v6(1478.33,2052.9) 1486.33,2060.9 C671.1@1493.47,2060.9 1498.45,2055.92 1508.02,2055.92 v6(1510.03,2053.91) 1512.19,2056.07 1520.64,2056.07 C670.1@1525.47,2060.9 ; C714.1@1493.47,1834.9 1483.47,1834.9 v2(1478.47,1839.9) 1473.47,1834.9 C713.1@1462.47,1834.9 ; v2@1509.42,1926.87 v2(1509.75,1927.21) ; v2(1509.75,1832.72) 1524.29,1832.72 C711.1@1526.47,1834.9 C712.1@1556.47,1834.9 ; C701.1@1526.47,1903.9 1520.47,1909.9 1497.47,1909.9 C702.1@1494.47,1906.9 ; v6@1542.89,1927.48 v6(1541.47,1928.9) ; C698.1@1557.47,1905.9 1541.47,1921.9 v6(1541.47,1928.9) ; v2(1572.75,1927.21) 1573.44,1927.9 C684.1@1591.47,1927.9 C693.1@1618.47,1927.9 ; C723.2@1587.47,1829.9 1598.47,1818.9 1615.47,1818.9 C709.1@1623.47,1826.9 ; C730.2@1602.47,1722.44 1622.01,1722.44 1635.47,1735.9 1634.05,1737.32 1634.05,1739.15 1634.29,1739.39 1634.44,1739.39 1635.32,1738.51 v13(1635.32,1736.19) ; v2(1446.76,1927.21) 1461.78,1927.21 C688.1@1463.47,1928.9 ; v2(1446.76,1927.21) 1463.47,1910.5 C703.1@1463.47,1908.9 C688.1@1463.47,1928.9 ; v2(1446.76,1927.21) 1446.76,1923.19 C704.1@1431.47,1907.9 C689.1@1431.47,1928.9 1445.07,1928.9 v2(1446.76,1927.21) ; C688.1@1463.47,1928.9 C687.1@1494.47,1928.9 ; C702.1@1494.47,1906.9 C687.1@1494.47,1928.9 ; C702.1@1494.47,1906.9 1509.75,1922.18 v2(1509.75,1927.21) ; C687.1@1494.47,1928.9 1508.06,1928.9 v2(1509.75,1927.21) ; v2(1509.75,1927.21) 1524.78,1927.21 C686.1@1526.47,1928.9 ; v2(1509.75,1927.21) 1509.75,1921.62 1525.16,1906.2 1541.47,1922.51 v6(1541.47,1928.9) ; C686.1@1526.47,1928.9 v6(1541.47,1928.9) ; C686.1@1526.47,1928.9 1526.47,1908.68 1555.69,1908.68 1557.47,1906.9 C685.1@1557.47,1928.9 v6(1541.47,1928.9)
  Bottom Layer w6: R635.1@556.06,2106.9 556.06,2135.19 v1@564.33,2143.46 ; C593.2@874.47,2808.31 907.06,2808.31 v5(908.47,2806.9) ; C619.1@987.47,2540.9 987.47,2543.9 v4(1005.47,2561.9) ; C662.1@1242.47,2108.9 1247.41,2108.9 1257.79,2098.52 1257.79,2084.69 1259.57,2082.9 1268.47,2082.9 C656.1@1274.47,2088.9 1304.47,2088.9 C661.1@1305.47,2089.9 ; C696.1@1243.47,1929.9 v6@1254.47,1929.9 ; v2(1257.79,2179.18) 1257.79,2173.58 1267.94,2163.43 C645.1@1305.03,2163.43 ; v6(1259.02,1928.58) 1259.02,1926.49 1259.47,1926.04 v6@1259.47,1924.9 ; C646.1@1273.53,2163.43 1273.47,2163.49 1273.47,2176.9 1287.01,2176.9 v2(1289.28,2179.18) C645.1@1305.03,2163.43 ; C692.1@1274.47,1929.9 v6@1264.47,1929.9 ; v2(1288.47,2056.9) 1293.47,2061.9 C674.1@1304.47,2061.9 ; C691.1@1305.47,1929.9 1315.47,1929.9 ; C691.1@1306.47,1930.9 1314.47,1930.9 1315.47,1929.9 ; v2@1320.78,2053.19 1312.07,2061.9 C674.1@1304.47,2061.9 ; v2(1320.78,2179.18) C644.1@1336.53,2163.43 ; C630.2@1329.47,2184.9 1329.47,2170.48 C644.1@1336.53,2163.43 ; C705.1@1335.47,1869.9 1335.47,1849.9 1348.47,1836.9 v2(1354.47,1836.9) ; C690.1@1336.47,1931.9 1329.47,1931.9 1327.47,1929.9 ; v2(1352.27,1927.21) 1349.58,1929.9 1327.47,1929.9 ; v2(1352.27,2116.18) 1345.99,2109.9 1330.47,2109.9 1310.47,2089.9 C661.1@1305.47,2089.9 ; v2(1415.27,2179.18) 1415.54,2178.9 C629.1@1432.47,2178.9 ; C643.1@1462.51,2163.43 1471,2163.43 1478.26,2170.69 v2(1478.26,2179.18) v2@1476.98,2177.9 ; v2(1509.75,2179.18) 1510.03,2178.9 C636.1@1525.47,2178.9 ; C652.1@1557.47,2091.9 1560.08,2091.9 1567.8,2099.62 1587.68,2099.62 v2(1604.24,2116.18) ; C633.1@1623.47,2169.9 1617.47,2163.9 1587.47,2163.9 1557.48,2163.89 C634.2@1555.47,2165.9 C634.2@1553.97,2165.9 ; v2(1635.74,2273.66) 1663.77,2273.66 C605.2@1669.47,2279.36 ; C642.2@1675.47,2115.9 1681.47,2121.9 1681.47,2153.9 C628.1@1675.47,2159.9 1694.75,2179.18 v2(1698.73,2179.18) ; C26.1@2242.47,1668.44 2242.47,1671.9 v6@2242.47,1696.9 ; C25.1@2292.47,1716.9 2303.47,1716.9 v6@2310.47,1723.9 ; v6@2390.47,1634.9 2392.47,1632.9 C19.1@2408.47,1632.9 ; v6@2390.47,1679.9 C20.1@2407.47,1679.9 ; v6@1254.47,1929.9 v6@1259.47,1924.9 ; v6@1254.47,1929.9 v6@1264.47,1929.9 ; v6@1259.47,1924.9 v6@1264.47,1929.9 ; C674.1@1304.47,2061.9 1305.47,2062.9 C661.1@1305.47,2089.9 ; C645.1@1305.03,2163.43 C644.1@1336.53,2163.43 ; 1315.47,1929.9 v6(1321.47,1923.9) 1327.47,1929.9 ; 1315.47,1929.9 1327.47,1929.9 ; C636.1@1525.47,2178.9 1540.97,2178.9 C634.2@1553.97,2165.9 ; C636.1@1525.47,2178.9 C648.1@1525.47,2162.9 1535.47,2162.9 v6(1540.47,2157.9) 1548.47,2165.9 C634.2@1553.97,2165.9
  Bottom Layer w8: 1144.47,2365.31 1144.47,2353.9 v6(1162.47,2335.9) ; v2(1192.48,2117.17) 1192.48,2115.04 1206.62,2100.9 C665.1@1210.47,2100.9 C665.1@1210.47,2100.36 ; C675.1@1212.47,2044.9 1243.01,2014.36 C682.1@1243.01,1997.9 1257.47,2012.36 v6@1257.47,2024.9 ; R602.1@1212.47,2193 R602.1@1212.47,2203.31 ; v2(1226.29,1801.22) v2@1257.79,1801.22 ; C722.1@1243.47,1824.9 C721.1@1273.47,1824.9 1273.47,1816.91 v2@1257.79,1801.22 ; C664.1@1243.47,2059.9 C676.1@1273.47,2059.9 ; v2(1258.29,1801.01) 1258,1801.01 v2@1257.79,1801.22 ; C720.1@1304.47,1825.9 1304.47,1816.41 v2(1289.28,1801.22) v2@1257.79,1801.22 ; v2@1353.47,1836.9 1356.45,1836.9 1384.47,1864.92 C694.1@1384.47,1876.44 ; C669.1@1383.47,2117.36 1414.09,2117.36 v2(1415.27,2116.18) ; C649.1@1397.15,2255.71 1406.25,2255.62 v24@1414.8,2246.9 ; C672.1@1463.47,2060.9 1478.47,2060.9 ; v6@1476.91,2051.48 v6(1478.33,2052.9) ; v6@1478.47,2055.9 1478.47,2060.9 ; v6(1510.03,2053.91) 1510.03,2055.34 1508.47,2056.9 1508.47,2060.9 ; C670.1@1525.47,2060.9 1508.47,2060.9 ; C679.1@1525.93,1992.9 1557.47,2024.44 C655.1@1557.47,2049.9 1569.47,2049.9 v2(1571.47,2051.9) 1577.47,2045.9 C657.1@1588.47,2045.9 ; C680.1@1666.93,1997.9 1691.93,2022.9 v6(1696.47,2022.9) ; 1478.47,2060.9 C671.1@1493.47,2060.9 1508.47,2060.9
  Bottom Layer w10: v4@357.47,3942.9 367.47,3932.9 C125.1@367.47,3899.9 ; v13(446.47,2903.9) Q510.2@485.47,2903.9 ; v2(446.47,3794.9) 446.47,3768.2 U22.33@444.52,3766.25 418.47,3740.2 418.47,3709.9 426.47,3701.9 448.47,3701.9 454.37,3696 U22.4@454.37,3674.9 454.37,3650 v2(469.47,3634.9) ; C768.2@509.93,3906.9 513.47,3903.36 U22.24@513.47,3857.6 558.17,3857.6 v2@587.47,3886.9 ; C43.1@528.06,2291.9 528.06,2176.9 R89.1@529.06,2175.9 ; C653.1@529.06,2234.9 536.79,2234.9 v1@564.62,2207.07 ; U22.26@535.87,3815.5 560.07,3815.5 v2@572.47,3827.9 ; 543.47,3640.9 v4@567.47,3640.9 ; v13(572.47,2974.9) 583.47,2985.9 C586.1@611.01,2985.9 ; C761.2@589.47,698.36 677.6,698.36 C763.2@684.47,691.49 734.06,691.49 v4@840.47,797.9 ; v13(595.47,3173.9) 623.42,3145.95 634.74,3145.95 636.54,3144.15 C570.1@641.63,3144.15 ; C596.1@783.47,2933.31 814.47,2933.31 ; C595.1@784.47,3118.36 795.01,3128.9 v4(856.47,3128.9) ; v13@814.47,2916.9 v13(814.47,2917.9) 814.47,2933.31 ; C545.1@824.47,3424.36 C544.1@895.47,3424.36 v4@895.47,3461.9 ; C563.1@905.88,3274.9 905.88,3209.49 v4(922.47,3192.9) ; C555.2@969.47,3360.44 973.54,3360.44 C550.1@1040.47,3427.36 1040.47,3427.48 1019.01,3448.94 1019.01,3472.36 v4(1014.47,3476.9) ; v4(992.47,3128.9) 997.45,3123.92 1074.49,3123.92 C573.1@1098.95,3148.38 ; v5(996.47,3194.9) 996.47,3221.9 1024.66,3250.09 1074.12,3250.09 C551.2@1102.93,3278.9 ; C600.1@1017.47,2926.31 1012.17,2931.61 998.51,2931.61 998.3,2931.4 816.38,2931.4 814.47,2933.31 ; C594.1@1092.47,3045.49 1124.88,3045.49 v4@1131.47,3038.9 ; v4(1150.47,3441.9) 1195.47,3396.9 C568.1@1195.47,3376.36 ; C604.1@1193.47,2568.36 v2(1193.47,2605.9) ; v2(1194.79,1864.22) 1201.48,1870.9 C708.1@1210.47,1870.9 ; v2(1194.8,1927.2) 1197.49,1929.9 C650.1@1210.47,1929.9 ; v2(1194.79,2179.18) 1202.47,2186.85 R602.1@1202.47,2204.31 ; C578.1@1208.47,3007.44 1276.47,3007.44 C591.1@1281.01,3002.9 ; C715.1@1243.47,1870.9 1272.47,1870.9 C707.1@1273.47,1869.9 1279.15,1864.22 v2(1289.28,1864.22) 1294.97,1869.9 C706.1@1304.47,1869.9 ; C692.1@1274.47,1929.9 1305.47,1929.9 C691.1@1306.47,1930.9 ; v2@1320.78,2053.19 1328.49,2060.9 C677.1@1335.47,2060.9 ; v5(1353.11,1707.07) 1384.47,1738.43 C716.1@1384.47,1739.44 ; v2(1446.76,2116.18) 1452.05,2110.9 C660.1@1463.47,2110.9 ; C659.1@1493.47,2111.9 1505.47,2111.9 v2@1506.47,2112.9 ; v2(1506.43,2113) 1506.43,2112.94 v2@1506.47,2112.9 ; C658.1@1518.47,2111.9 1517.47,2112.9 v2@1506.47,2112.9 ; C712.1@1556.47,1834.9 1558.65,1832.72 v2(1572.75,1832.72) 1584.65,1832.72 C723.2@1587.47,1829.9 ; C685.1@1557.47,1928.9 1571.05,1928.9 v2(1572.75,1927.21) ; R38.2@1664.47,2398.49 1667.66,2395.3 v2(1698.8,2395.3) v2@1698.8,2397.19 ; C539.1@1678.47,3584.44 1720.93,3626.9 U510.2@1737.47,3626.9 ; R605.1@1819.06,2342.9 1819.06,2325.31 v2(1837.47,2306.9) ; v4(1852.72,2071.34) 1894.47,2029.59 C627.1@1894.47,2018.44 ; C558.2@1930.06,3604.9 1963.15,3604.9 v3@1965.82,3602.24 ; C27.1@2153.84,1640.95 2212.41,1640.95 v6(2212.47,1640.9) ; v6(2174.58,1700.01) 2174.58,1706.01 2183.47,1714.9 C23.1@2192.47,1714.9 ; C26.1@2242.47,1671.9 2248.47,1677.9 C21.1@2289.47,1677.9 ; v3@2472.45,3215.46 2490.41,3197.5 RN502.5@2500.27,3197.5 ; v3@2480.61,3006.92 2497.27,2990.26 RN503.5@2497.27,2987.5 ; RN503.10@2547.67,2880.3 2591.21,2880.3 v1@2592.05,2881.14 ; RN502.10@2550.67,3090.3 2550.67,3066.39 v3@2557.56,3059.5 ; D501.1@2770.47,4040.9 2770.65,4041.08 v3@2790.06,4041.08 ; C129.1@3079.59,3741.84 3079.59,3723.1 v8@3097.83,3704.86 ; C128.1@3084.59,3933.84 3084.59,3925.76 v8(3109,3901.35)
  Bottom Layer w15: v3@941.67,1769.83 949.99,1769.83 R107.1@975.47,1795.31 ; v4(2031.47,2220.9) v4@2099.06,2220.9 ; C624.1@2108.06,2279.9 2108.06,2257.9 2099.06,2248.9 C639.1@2099.06,2181.9 2108.06,2181.9 v4(2127.61,2201.45)
  Bottom Layer w20: v3(153.91,1778.77) 154.24,1779.1 182.82,1779.1 193.67,1789.95 193.67,1852.7 Q302.2@155.47,1890.9 ; SW5.1@156.47,2225.9 161.47,2230.9 Q303.2@161.47,2371.9 ; Q301.2@175.47,1346.9 217.99,1346.9 v3@242.37,1322.52 ; C560.1@391.93,3021.9 C571.1@391.93,3154.9 ; C560.1@393.93,3021.9 C560.1@393.93,3019.9 404.47,3019.9 446.47,3061.9 420.47,3087.9 C577.1@394.93,3087.9 401.2,3087.9 437.31,3124.01 406.42,3154.9 C571.1@391.93,3154.9 ; v4@432.44,3254.97 401.37,3223.9 C566.1@391.93,3223.9 ; v3(529.25,1509.7) 535.06,1515.51 C717.1@535.06,1546.9 R599.1@535.06,1606.9 ; C562.2@707.47,3359.49 707.47,3408.44 v3@707.98,3408.95 ; C582.1@736.47,3096.49 762.6,3096.49 C595.1@784.47,3118.36 845.93,3118.36 v4(856.47,3128.9) ; C552.1@773.01,3274.9 773.01,3234.29 812.4,3194.9 v5@848.47,3194.9 ; C564.1@894.06,3235.9 894.06,3221.31 v4(922.47,3192.9) ; R591.1@903.47,2925.31 925.47,2903.31 925.47,2823.9 v5(908.47,2806.9) ; C592.2@959.47,2925.31 959.47,2854.9 v5(998.47,2815.9) ; C576.1@995.88,3171.9 995.88,3194.31 v5(996.47,3194.9) ; C906.1@1027.47,465.5 1049.02,465.5 v3(1080.94,497.42) ; C569.1@1125.47,3417.49 1126.06,3417.49 v4(1150.47,3441.9) ; C579.1@1155.47,2999.31 1202.34,2999.31 C578.1@1210.47,3007.44 ; C914.1@1249.87,723.9 1276.99,696.78 v3(1276.99,595.21) ; C591.1@1281.01,3002.9 C583.1@1281.01,3074.9 ; C912.1@1428.47,654.5 1492.66,654.5 C524.2@1508.47,670.31 ; C913.1@1447.87,838.9 1447.87,795.79 v3(1479.84,763.82) ; C525.2@1711.47,762.36 1800.53,762.36 C904.2@1809.47,771.3 1815.03,771.3 v3(1853.76,810.03) ; v3@2173.05,4016.14 2190.51,4016.14 U6.3@2255.47,4081.1 U6.2@2255.47,4118.5 ; C571.1@391.93,3154.9 C566.1@391.93,3223.9 ; C571.1@391.93,3154.9 401.47,3154.9 437.47,3190.9 404.47,3223.9 C566.1@391.93,3223.9 ; C583.1@1281.01,3074.9 1306.13,3100.02 1306.13,3117.78 C574.1@1281.01,3142.9 ; C583.1@1281.01,3074.9 C574.1@1281.01,3142.9 ; C574.1@1281.01,3142.9 1307.62,3169.51 1307.62,3186.29 C581.1@1281.01,3212.9 C574.1@1281.01,3142.9
  Bottom Layer w30: C788.2@2128.47,1120.88 2172.49,1164.9 U51.4@2271.47,1164.9
  other v1: 1675.95,851.65 1489.37,852.81 1542.59,881.31 1634.61,888.42 444.41,1614 569.76,1614.61 632.3,1615.41 694.78,1615.72 775.18,1767.25 869.44,1767.58 790.39,1834.54 1068.28,1867.34 331.99,1881.21 502.77,1918.88 1131.81,2021.87 711.05,2030.42 1809.82,2130.28 691.62,2145.58 788.22,2145.99 830.54,2174.49 565.64,2206.3 787.16,2332.54 845.86,2342.48 691.76,2363.81 613.32,2401.53 374.6,2411.2 2442.86,2420.5 2641.92,2421.53 2615.24,2422.55 530.41,2429.99 805.43,2482.13 683.73,2485.87 2591,2882.25 1618.3,3614.38
  other v2: 1137.72,1830.33 1320.13,2054.69 1258.47,2057.9 1039.47,2181.9 1162.72,2241.24 2119.47,2376.9 422.87,2521.9 1538.47,2697.9 181.01,2872.9 1571.47,2930.9 706.47,3176.9 1645.04,3673.11 574.47,3829.9 349.47,3856.9 587.47,3888.9
  other v3: 1682.3,221.39 1831.93,221.39 1478.85,227.85 1027.83,228.93 1299.09,228.93 1122.56,232.16 2101.03,267.88 1480.14,317.74 1165.74,324.47 1273.26,379.63 1055.37,386.92 1186.65,388.97 1947.16,396.75 2041.18,396.41 1893.43,399.16 1852.64,407.28 1324.31,408.73 1261.42,468.97 1326.06,477.99 1854.85,479.02 1901.35,484.57 1954.04,484.92 2003.64,486.99 2055.74,492.63 2045.91,531.85 1998.65,534.37 1904.77,536.9 1953.29,536.9 1271.1,540.02 1110.13,589.69 2069.42,635.26 1950.94,776.11 2082.41,782.84 1224.82,787.6 2010.15,789.62 1832.38,856.05 1559.48,1275.3 245.17,1321.58 313.25,1437.51 312.99,1473.05 658.91,1510.48 879.79,1537.71 332.85,1561.69 879.53,1565.23 616.59,1575.19 823.52,1580.82 301.7,2402.07 454.74,2404.78 534.25,2513.69 972.27,2618.62 2479.52,3010.05 2559.69,3057.1 2474.78,3212.79 707.21,3411.25 616.35,3460.51 1965.74,3671.36 2792.99,4039.91 1218.75,4099.32 2089.35,4732.56
  other v4: 153.61,1184.9 1075.47,1448.9 895.62,1469.47 1069.47,1486.9 987.47,1522.9 2094.47,2226.9 1244.47,3005.9 1126.76,3037.81 1281.01,3038.9 390.52,3053.29 856.95,3054.74 993.72,3055.99 443.46,3058.89 1279.47,3108.9 1307.9,3108.54 391.78,3121.91 435.42,3124.01 923.47,3126.9 1281.01,3176.9 1308.69,3177.1 436.47,3192.9 434.42,3257.52 1804.48,3377.54 894.47,3463.9 572.47,3639.9 282.47,3707.9 358.47,3942.9
  other v5: 224.47,54.9 787.47,2641.9 755.47,2813.9 850.47,3194.9 746.47,3731.9 857.47,3874.9 277.47,4006.31 432.47,4127.9
  other v6: 2242.47,1697.9 1224.47,1992.9 1572.47,2303.9 1191.47,2367.9
  other v7: 1067.96,2305.49
  other v8: 1476.21,656.64 3098.68,3702.59 1243.46,4395.61
  other v9: 1001.49,779.46 2898.71,4071.09 2769.35,4200.02 1706.93,4550.78
  other v11: 1162.89,1896.19 1021.94,2405.62
  other v12: 1071.04,2113
  other v17: 1614.99,2544.2
  other v21: 844.47,519.9